# Altium PCB fhd-hdr.PcbDoc
Units mil, origin at the board's own origin, x right, y up, seen from the top; angles counter-clockwise.
Board outline 1400 x 650 mil, 6 copper layers (Top, 2-GND, 3-SIG, 4-SIG, 5-GND, Bottom), stack 46.142 mil thick; 75 components, 43 nets, 307 pads, 181 vias.
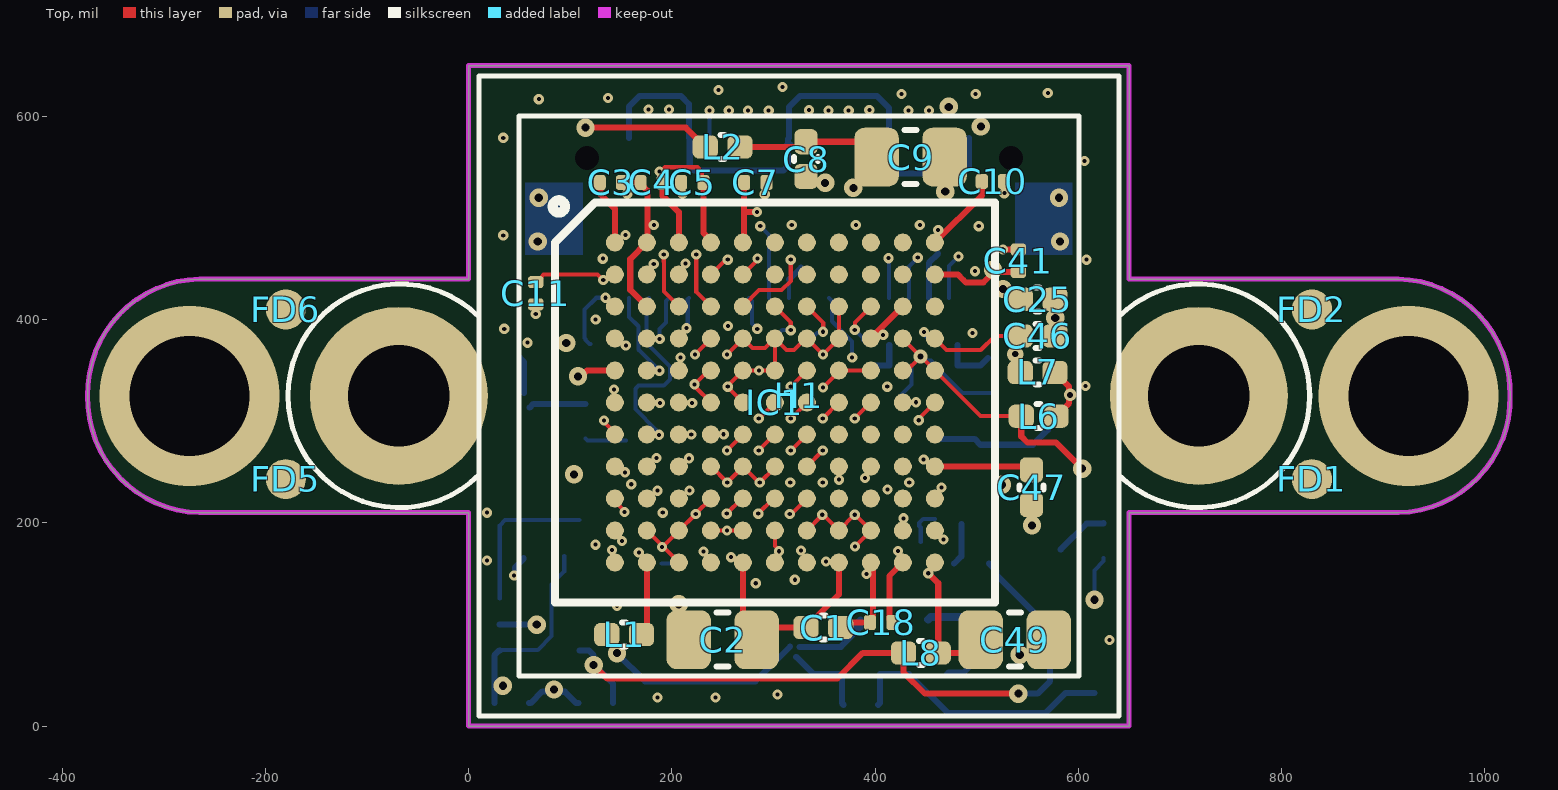
[diagram p0: Top view]
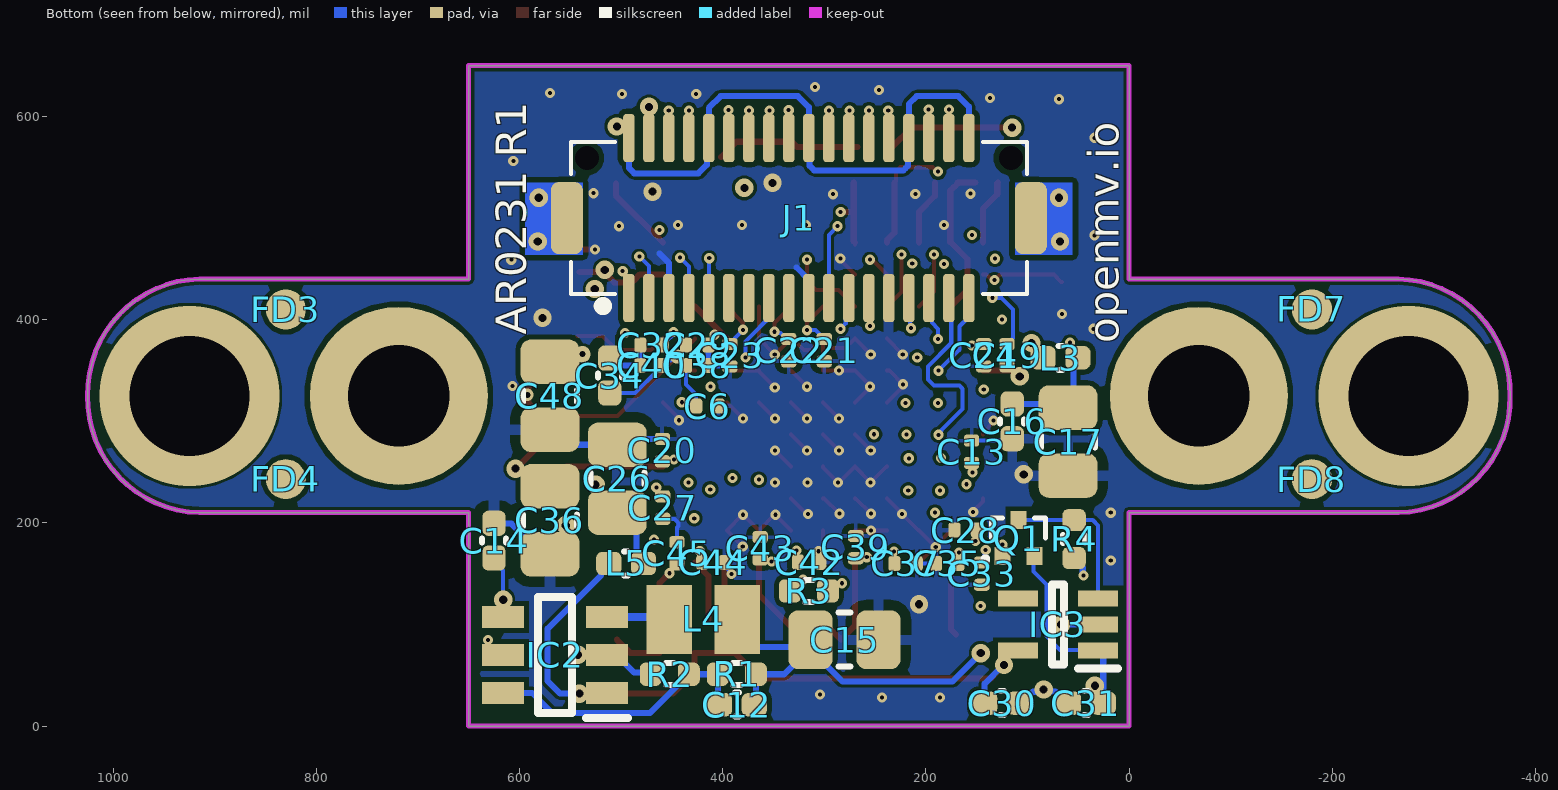
[diagram p1: Bottom view, seen from below]
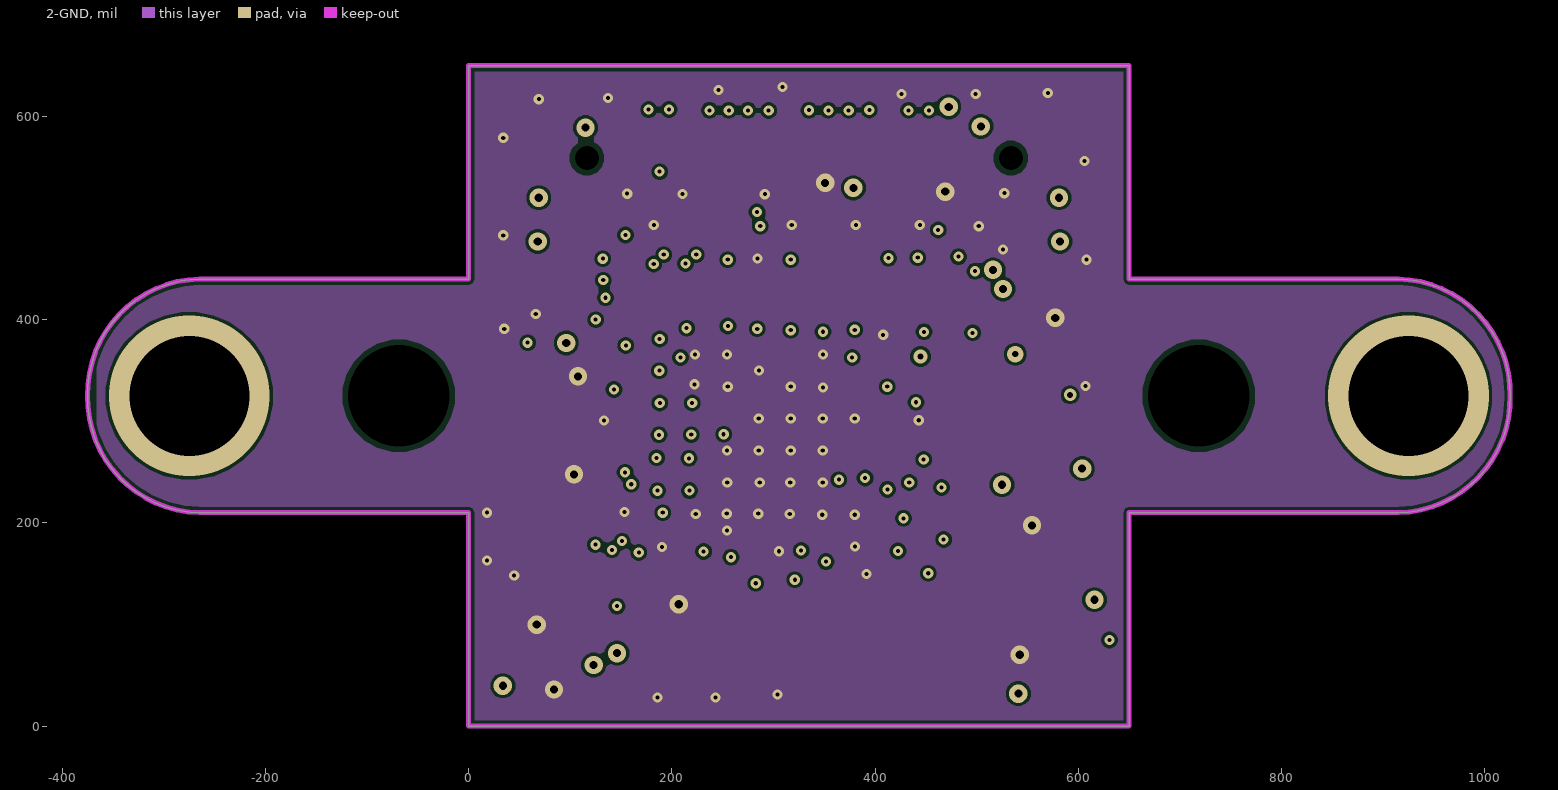
[diagram p2: 2-GND]
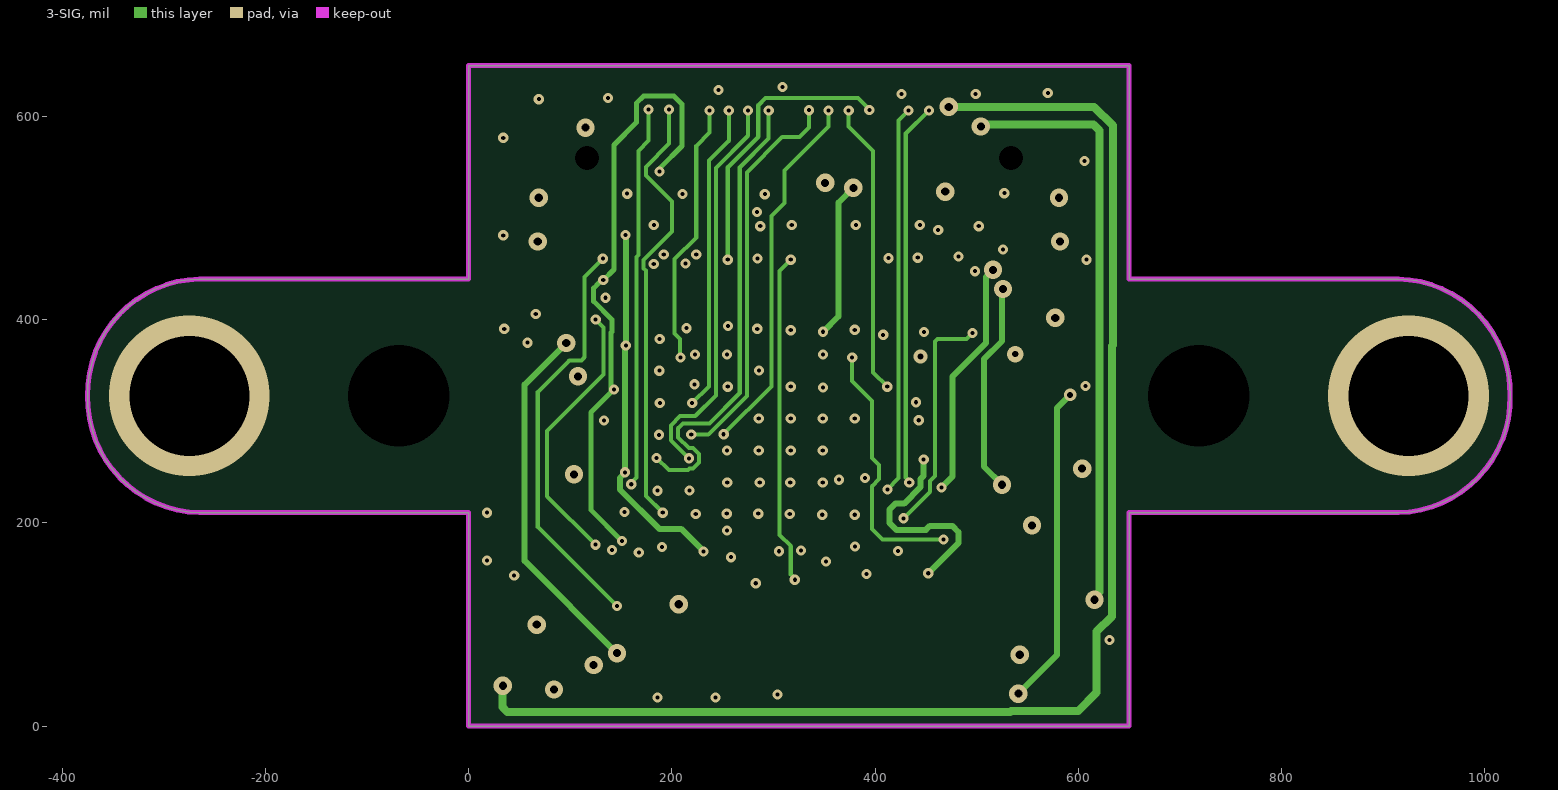
[diagram p3: 3-SIG]
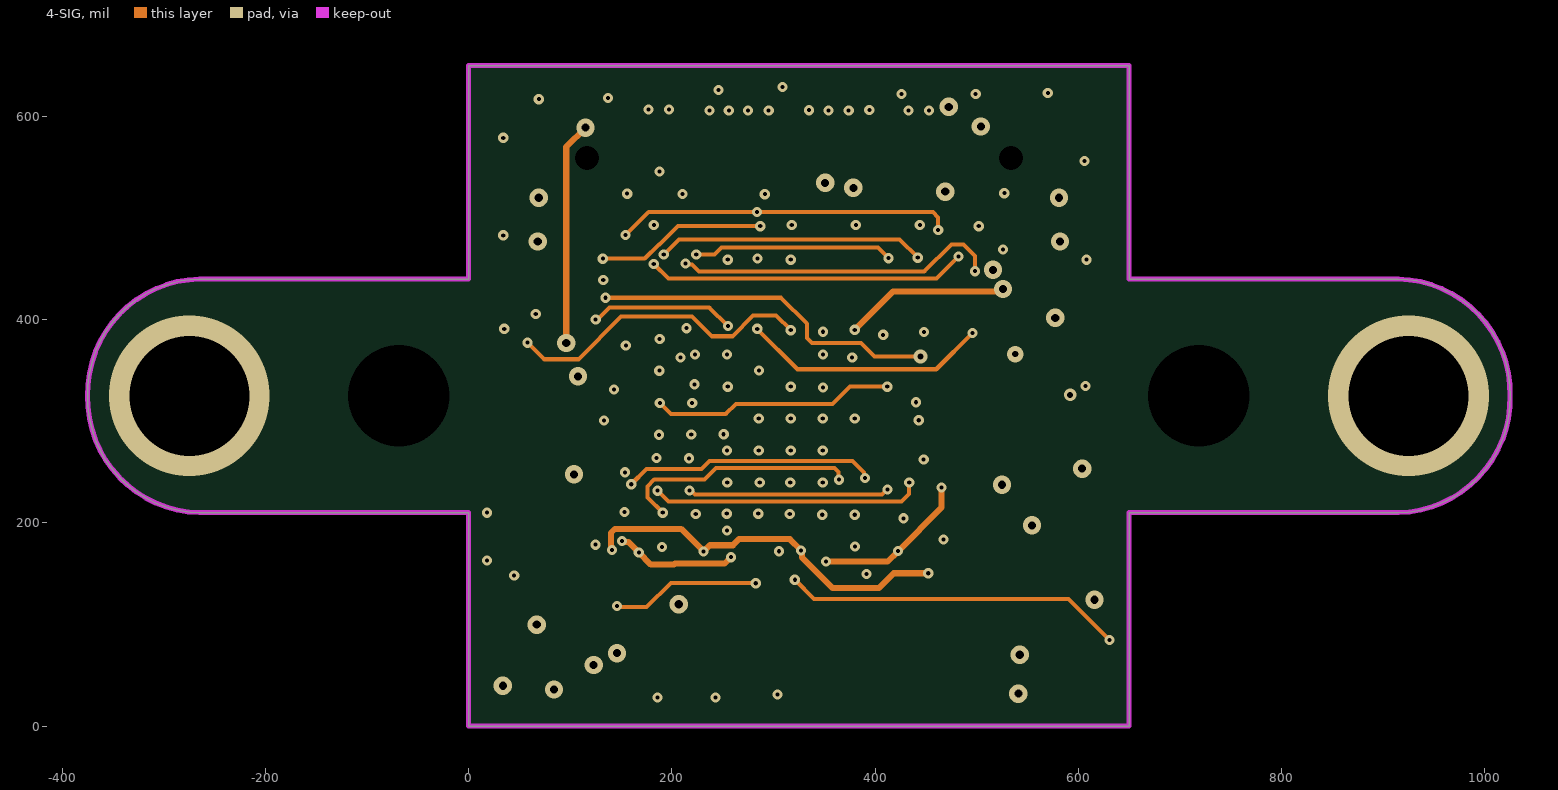
[diagram p4: 4-SIG]
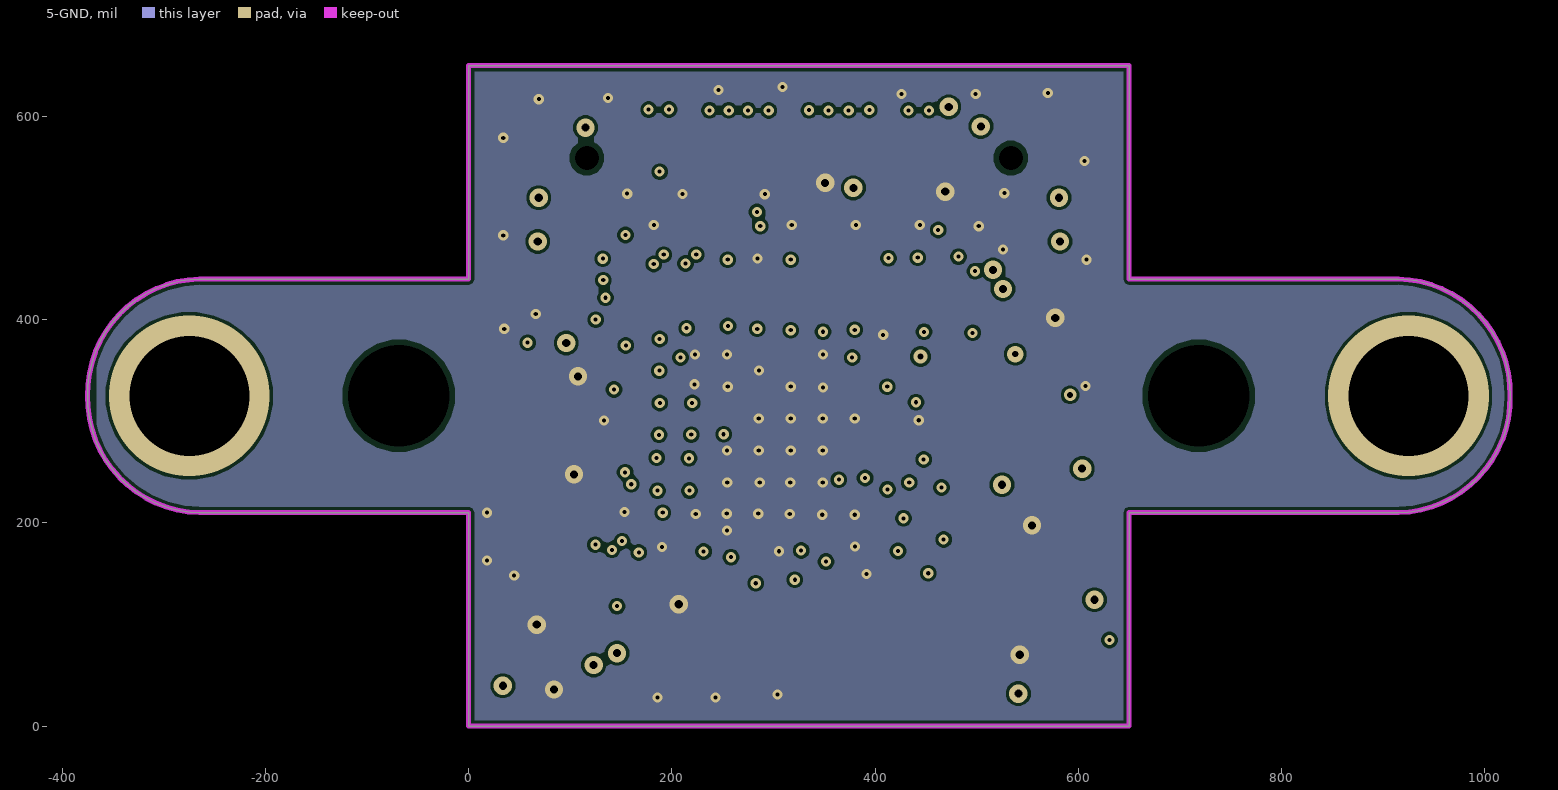
[diagram p5: 5-GND]
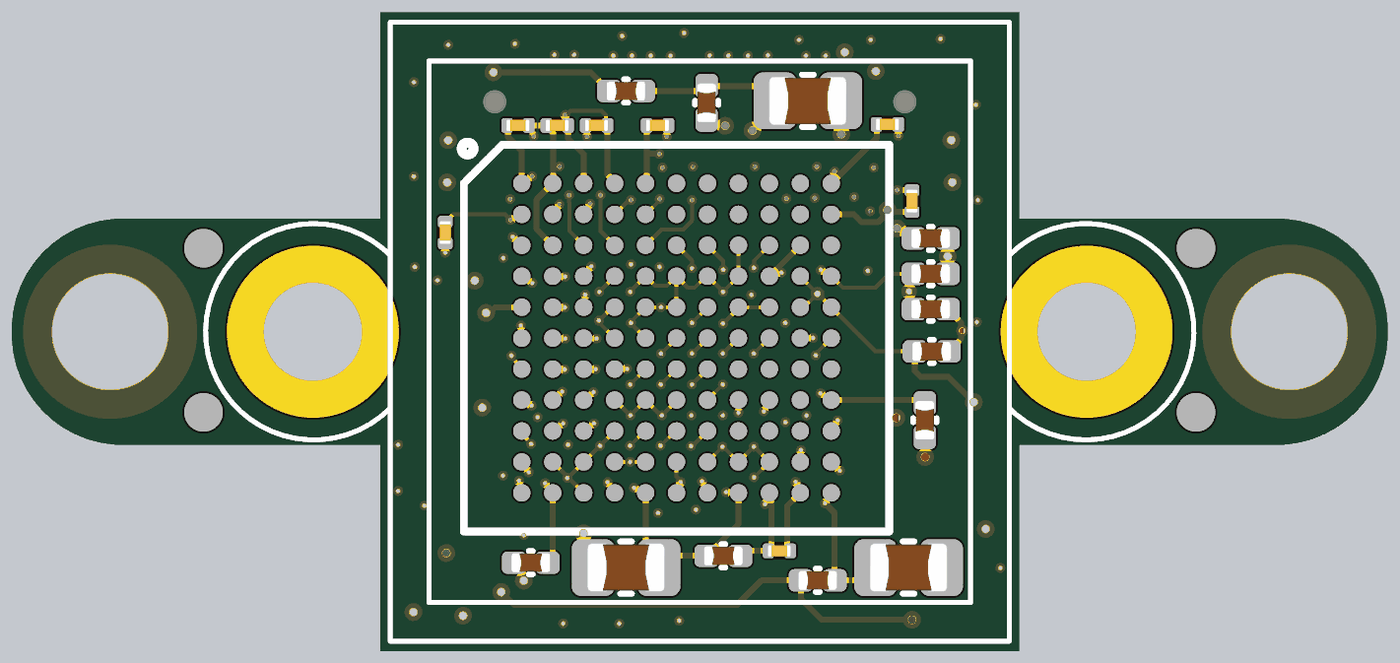
[diagram p6: 3D render of the assembled board from above, using the file's embedded part models]
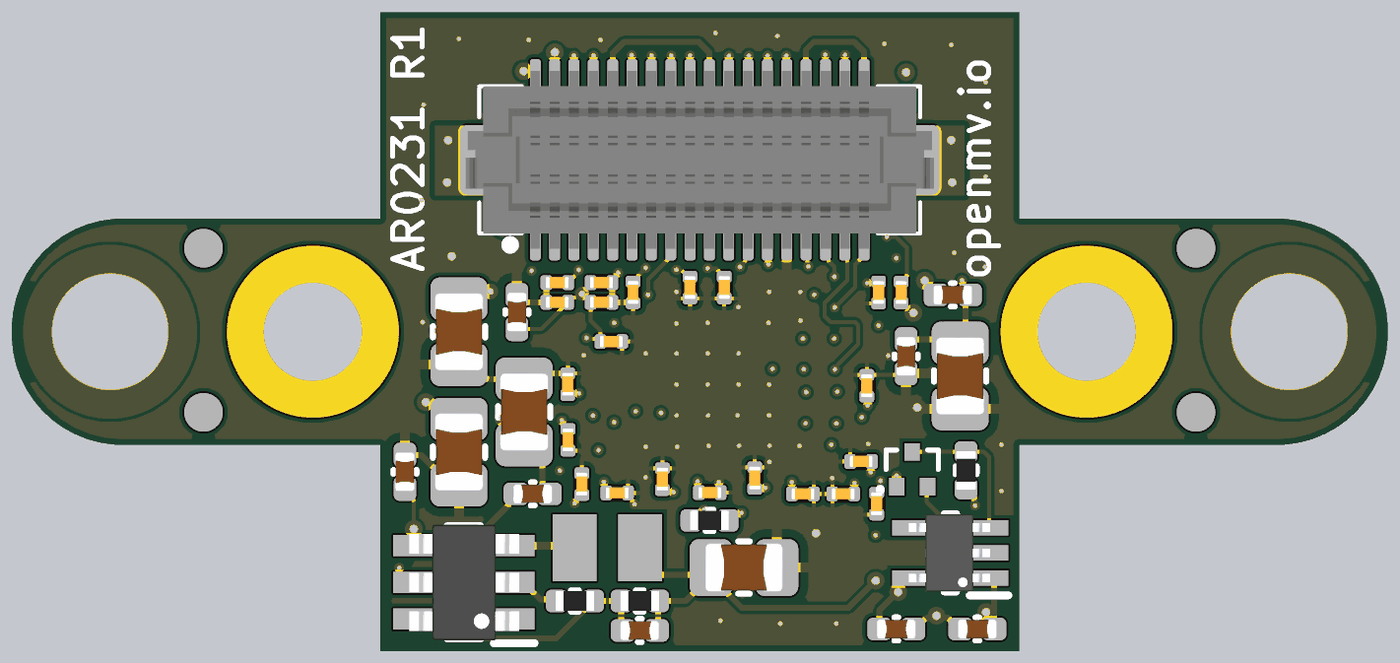
[diagram p7: 3D render of the assembled board from below, using the file's embedded part models]

## Layer stack, top to bottom
Top Solder: solder mask 0.4, Solder Resist, Dk 3.5
Top: signal copper 1.378
Dielectric 2: prepreg 5, PP-006, Dk 4.1
2-GND: signal copper 1.378
Dielectric 3: prepreg 10, PP-006, Dk 4.1
3-SIG: signal copper 1.378
Dielectric 1: dielectric 7.874, FR-4, Dk 4.8
4-SIG: signal copper 1.378
Dielectric 4: prepreg 10, PP-006, Dk 4.1
5-GND: signal copper 1.378
Dielectric 9: prepreg 5, PP-006, Dk 4.1
Bottom: signal copper 1.378
Bottom Solder: solder mask 0.4, Solder Resist, Dk 3.5

## Board outline
914.97,210 649.97,210 649.97,0 -0.03,0 -0.03,210 -265.03,210 cw(c-262.53,322.5) -375.03,325 cw(c-262.53,327.5) -265.03,440 -0.03,440 -0.03,650 649.97,650 649.97,440 914.97,440 cw(c912.47,327.5) 1024.97,325 cw(c912.47,322.5)

## Design rules (kind name [scope] priority, off if disabled: settings)
BoardOutlineClearance mdCopperDimension [All] p1: gap=10 ignorepadtopadclearanceinfootprint=FALSE except(0: Arc-SplitContinuation Track-SplitContinuation SMDPad-SplitContinuation THPad-SplitContinuation Via-SplitContinuation Fill-SplitContinuation Poly-SplitContinuation Region-SplitContinuation Text-SplitContinuation; 3: Poly-OutlineEdge Poly-CavityEdge Poly-CutoutEdge Poly-SplitBarrior)
Clearance [All] p1: gap=3 ignorepadtopadclearanceinfootprint=FALSE except(5: SMDPad-Fill SMDPad-Poly SMDPad-Region THPad-Fill THPad-Poly THPad-Region Fill-Fill Fill-Poly Fill-Region Poly-Poly Poly-Region Region-Region)
ComponentClearance ComponentClearance_1 [InComponent('H1')] p1: gap=0 collisioncheckmode=3 verticalgap=0 showdistances=FALSE
ComponentClearance [not InComponent('H1')] p2: gap=6 collisioncheckmode=3 verticalgap=0 showdistances=FALSE
HoleSize HoleSize_For_NetClass_signal [InNetClass('signal')] p1: absolutevalues=TRUE maxlimit=4 minlimit=4 maxpercent=80.000 minpercent=20.000
HoleSize HoleSize_For_NetClass_pwr [InNetClass('pwr')] p2: absolutevalues=TRUE maxlimit=4 minlimit=4 maxpercent=80.000 minpercent=20.000
HoleSize HoleSize_For_NetClass_gnd [InNetClass('gnd')] p3: absolutevalues=TRUE maxlimit=4 minlimit=4 maxpercent=80.000 minpercent=20.000
HoleSize [All] p4: absolutevalues=TRUE maxlimit=100000 minlimit=4 maxpercent=80.000 minpercent=20.000
HoleToHoleClearance mdDrill [All] p1: gap=3 allowstackedmicrovias=TRUE
MinimumSolderMaskSliver [All] p1 off: minsoldermaskwidth=10
PasteMaskExpansion Expansion_SMDPaste_OFF [InPadClass('SMDPaste_OFF')] p1: expansion=0
PasteMaskExpansion mlMinCreamFrame [All] p2: expansion=0
PolygonConnect 0201 [HasFootprint('C0201')] p1: thpad.connectstyle=Relief thpad.reliefconductorwidth=10 thpad.reliefentries=4 thpad.polygonreliefangle="90 Angle" thpad.airgapwidth=10 smdpad.connectstyle=Relief smdpad.reliefconductorwidth=4 smdpad.reliefentries=4 smdpad.polygonreliefangle="90 Angle" smdpad.airgapwidth=6 via.connectstyle=Direct via.reliefconductorwidth=10 via.reliefentries=4 via.polygonreliefangle="90 Angle" via.airgapwidth=10
PolygonConnect PolygonConnect_1 [All] p2: thpad.connectstyle=Relief thpad.reliefconductorwidth=10 thpad.reliefentries=4 thpad.polygonreliefangle="90 Angle" thpad.airgapwidth=10 smdpad.connectstyle=Relief smdpad.reliefconductorwidth=10 smdpad.reliefentries=4 smdpad.polygonreliefangle="90 Angle" smdpad.airgapwidth=10 via.connectstyle=Direct via.reliefconductorwidth=10 via.reliefentries=4 via.polygonreliefangle="90 Angle" via.airgapwidth=10
RoutingVias [All] p1: holewidth=4 width=10 viastyle="Through Hole" minholewidth=4 minwidth=10 maxholewidth=100 maxwidth=100
SolderMaskExpansion mlMinStopFrame [All] p1: expansion=2 istentingtop=FALSE
Width Width_For_NetClass_signal [InNetClass('signal')] p1: maxlimit=10 minlimit=3 preferedwidth=3
Width Width_For_NetClass_pwr [InNetClass('pwr')] p2: maxlimit=10 minlimit=3 preferedwidth=3
Width Width_For_NetClass_gnd [InNetClass('gnd')] p3: maxlimit=10 minlimit=3 preferedwidth=3
Width [All] p4: maxlimit=10 minlimit=3 preferedwidth=3
25 further rules are at their usual default settings.

## Classes and differential pairs
pad class SMDPaste_OFF: FD1-1 FD2-1 FD3-1 FD4-1 FD5-1 FD6-1 FD7-1 FD8-1 J1-1 J1-2 J1-3 J1-4 J1-5 J1-6 J1-7 J1-8 J1-9 J1-10 J1-11 J1-12 J1-13 J1-14 J1-15 J1-16 J1-17 J1-18 J1-19 J1-20 J1-21 J1-22 J1-23 J1-24 J1-25 J1-26 J1-27 J1-28 J1-29 J1-30 J1-31 J1-32 J1-33 J1-34 J1-35 J1-36

## Components (designator, comment, footprint, x,y, rotation, side; value= is the part's Value field where it differs from the comment)
C1 "4.7uF" 0402 349,97 r180 top
C2 "22uF" 0805 249.97,85 r0 top
C3 "0.22uF" C0201 140,535 r0 top
C4 "0.22uF" C0201 179.97,535 r180 top
C5 "0.22uF" C0201 219.97,535 r180 top
C6 "0.22uF" C0201 414.97,315 r0 bottom
C7 "0.22uF" C0201 282,535 r0 top
C8 "4.7uF" 0402 332,558 r90 top
C9 "22uF" 0805 434.97,560 r180 top
C10 "0.22uF" C0201 516,536 r0 top
C11 "0.22uF" C0201 66,426 r270 top
C12 "6.8pF" 0402 386,21 r0 bottom
C13 "0.22uF" C0201 154.97,270 r270 bottom
C14 "4.7uF" 0402 624.97,182.5 r270 bottom
C15 "22uF" 0805 280,85 r0 bottom
C16 "4.7uF" 0402 114.97,300 r90 bottom
C17 "22uF" 0805 59.97,280 r90 bottom
C18 "0.22uF" C0201 406,102 r180 top
C19 "0.22uF" C0201 120,365 r270 bottom
C20 "0.22uF" C0201 459.3,271.61 r270 bottom
C21 "0.22uF" C0201 299.97,370 r270 bottom
C22 "0.22uF" C0201 334.97,370 r270 bottom
C23 "0.22uF" C0201 392.86,365.02 r270 bottom
C24 "0.22uF" C0201 143,365 r270 bottom
C25 "4.7uF" 0402 560,420 r180 top
C26 "22uF" 0805 503.64,243.41 r270 bottom
C27 "0.22uF" C0201 459,215 r90 bottom
C28 "0.22uF" C0201 160.79,192.96 r180 bottom
C29 "0.22uF" C0201 424.97,375 r180 bottom
C30 "4.7uF" 0402 124.97,22.5 r0 bottom
C31 "4.7uF" 0402 42.47,22.5 r180 bottom
C32 "0.22uF" C0201 469.97,375 r0 bottom
C33 "0.22uF" C0201 144.97,150 r90 bottom
C34 "4.7uF" 0402 511,345 r270 bottom
C35 "0.22uF" C0201 179,160 r180 bottom
C36 "22uF" 0805 569.97,202.5 r90 bottom
C37 "0.22uF" C0201 219.97,160 r0 bottom
C38 "0.22uF" C0201 424.97,355 r180 bottom
C39 "0.22uF" C0201 268.98,176.09 r270 bottom
C40 "0.22uF" C0201 469.97,355 r0 bottom
C41 "0.22uF" C0201 541,458 r90 top
C42 "0.22uF" C0201 314.79,161.33 r0 bottom
C43 "0.22uF" C0201 363,175 r270 bottom
C44 "0.22uF" C0201 409,161 r0 bottom
C45 "0.22uF" C0201 444.97,170 r270 bottom
C46 "4.7uF" 0402 560,384 r180 top
C47 "4.7uF" 0402 554,235 r90 top
C48 "22uF" 0805 569.97,325 r90 bottom
C49 "22uF" 0805 537.47,85 r180 top
FD1 "FIDUCIAL1X2" FIDUCIAL-1X2 829.97,243 r0 top
FD2 "FIDUCIAL1X2" FIDUCIAL-1X2 829.97,410 r0 top
FD3 "FIDUCIAL1X2" FIDUCIAL-1X2 829.97,410 r180 bottom
FD4 "FIDUCIAL1X2" FIDUCIAL-1X2 829.97,243 r180 bottom
FD5 "FIDUCIAL1X2" FIDUCIAL-1X2 -180.03,243 r0 top
FD6 "FIDUCIAL1X2" FIDUCIAL-1X2 -180.03,410 r0 top
FD7 "FIDUCIAL1X2" FIDUCIAL-1X2 -180.03,410 r180 bottom
FD8 "FIDUCIAL1X2" FIDUCIAL-1X2 -180.03,243 r180 bottom
H1 "LENSMOUNT20MM" LENSMOUNT-20MM 324.97,325 r0 top locked
IC1 "AR0231AT7C00XUEA0-DRBR-E" BGA121C80P11X11_1100X1000X155 301.35,318.5 r0 top locked
IC2 "TLV62568PDDCR" SOT95P280X110-6N 564.97,70 r0 bottom
IC3 "MIC5365-2.8YC5-TR" SOT65P210X110-5N 69.97,100 r0 bottom
J1 "DF12-36-DP" DF12-36-DP 325,500 r0 bottom
L1 "100" 0402 153,90 r180 top
L2 "100" 0402 249.97,570 r180 top
L3 "100" 0402 67.47,362.5 r0 bottom
L4 "MAKK2016T2R2M" INDC2016X100N 419,105 r0 bottom
L5 "100" 0402 494.97,160 r0 bottom
L6 "100" 0402 561,305 r0 top
L7 "100" 0402 560,348 r0 top
L8 "100" 0402 445,72 r180 top
Q1 "SSM3J15FV,L3F" SSM3J15FV 108.8,184.98 r180 bottom
R1 "100K" R0402 386,51 r180 bottom
R2 "100K" R0402 452,51 r0 bottom
R3 "10K" R0402 315,133 r180 bottom
R4 "100K" R0402 54,184 r270 bottom

## Footprints (in the part's own frame and the unit in brackets; to place one, negate y for a bottom-side part, rotate by r counter-clockwise, add the part's x,y. Pads: shape width x height; smd on the part's side, far side on the other; paste and mask are expansions set on the pad)
0402 [mm] "Chip Capacitor, 2-Leads, Body  0402 (in) 1005 (mm), IPC Medium Density"
  rrect52% 0.63x0.58 smd mask+0.05: 1(-0.435,0) 2(0.435,0)
  silkscreen extent -0.05,-0.3 0.05,0.3, body extent -0.5,-0.25 0.5,0.25, height 0.5
0805 [mm] "Chip Capacitor, Body 0805 imperial, 2.0x1.2mm, IPC Medium Density"
  rrect45% 1.11x1.47 smd: 1(-0.85,0) 2(0.85,0)
  silkscreen extent -0.15,-0.67 0.15,0.67, body extent -1,-0.62 1,0.63, height 1.25
BGA121C80P11X11_1100X1000X155 [mil] "BGA121C80P11X11_1100X1000X155"
  rrect100% 17.72x17.72 smd: A1(-157.48,157.48) A2(-125.98,157.48) A3(-94.49,157.48) A4(-62.99,157.48) A5(-31.5,157.48) A6(0,157.48) A7(31.5,157.48) A8(62.99,157.48) A9(94.49,157.48) A10(125.98,157.48) A11(157.48,157.48) B1(-157.48,125.98) B2(-125.98,125.98) B3(-94.49,125.98) B4(-62.99,125.98) B5(-31.5,125.98) B6(0,125.98) B7(31.5,125.98) B8(62.99,125.98) B9(94.49,125.98) B10(125.98,125.98) B11(157.48,125.98) C1(-157.48,94.49) C2(-125.98,94.49) C3(-94.49,94.49) C4(-62.99,94.49) C5(-31.5,94.49) C6(0,94.49) C7(31.5,94.49) C8(62.99,94.49) C9(94.49,94.49) C10(125.98,94.49) C11(157.48,94.49) D1(-157.48,62.99) D2(-125.98,62.99) D3(-94.49,62.99) D4(-62.99,62.99) D5(-31.5,62.99) D6(0,62.99) D7(31.5,62.99) D8(62.99,62.99) D9(94.49,62.99) D10(125.98,62.99) D11(157.48,62.99) E1(-157.48,31.5) E2(-125.98,31.5) E3(-94.49,31.5) E4(-62.99,31.5) E5(-31.5,31.5) E6(0,31.5) E7(31.5,31.5) E8(62.99,31.5) E9(94.49,31.5) E10(125.98,31.5) E11(157.48,31.5) F1(-157.48,0) F2(-125.98,0) F3(-94.49,0) F4(-62.99,0) F5(-31.5,0) F6(0,0) F7(31.5,0) F8(62.99,0) F9(94.49,0) F10(125.98,0) F11(157.48,0) G1(-157.48,-31.5) G2(-125.98,-31.5) G3(-94.49,-31.5) G4(-62.99,-31.5) G5(-31.5,-31.5) G6(0,-31.5) G7(31.5,-31.5) G8(62.99,-31.5) G9(94.49,-31.5) G10(125.98,-31.5) G11(157.48,-31.5) H1(-157.48,-62.99) H2(-125.98,-62.99) H3(-94.49,-62.99) H4(-62.99,-62.99) H5(-31.5,-62.99) H6(0,-62.99) H7(31.5,-62.99) H8(62.99,-62.99) H9(94.49,-62.99) H10(125.98,-62.99) H11(157.48,-62.99) J1(-157.48,-94.49) J2(-125.98,-94.49) J3(-94.49,-94.49) J4(-62.99,-94.49) J5(-31.5,-94.49) J6(0,-94.49) J7(31.5,-94.49) J8(62.99,-94.49) J9(94.49,-94.49) J10(125.98,-94.49) J11(157.48,-94.49) K1(-157.48,-125.98) K2(-125.98,-125.98) K3(-94.49,-125.98) K4(-62.99,-125.98) K5(-31.5,-125.98) K6(0,-125.98) K7(31.5,-125.98) K8(62.99,-125.98) K9(94.49,-125.98) K10(125.98,-125.98) K11(157.48,-125.98) L1(-157.48,-157.48) L2(-125.98,-157.48) L3(-94.49,-157.48) L4(-62.99,-157.48) L5(-31.5,-157.48) L6(0,-157.48) L7(31.5,-157.48) L8(62.99,-157.48) L9(94.49,-157.48) L10(125.98,-157.48) L11(157.48,-157.48)
  silkscreen extent -219,-197 217,199, body extent -217,-197 217,197, height 39
C0201 [mil] "0201 IPC-7351"
  rrect50% 12x15 smd mask+1.97: 1(-11,0) 2(11,0)
  body extent -12,-6 12,6, height 14
DF12-36-DP [mm] "36 Position Connector Receptacle, Center Strip Contacts Surface Mount Gold"
  rrect50% 0.8x1.8 smd mask+0.05: 0(-5.8,0) 0(5.8,0)
  rrect50% 0.28x1.2 smd mask+0.05: 1(4.25,2) 2(4.25,-2) 3(3.75,2) 4(3.75,-2) 5(3.25,2) 6(3.25,-2) 7(2.75,2) 8(2.75,-2) 9(2.25,2) 10(2.25,-2) 11(1.75,2) 12(1.75,-2) 13(1.25,2) 14(1.25,-2) 15(0.75,2) 16(0.75,-2) 17(0.25,2) 18(0.25,-2) 19(-0.25,2) 20(-0.25,-2) 21(-0.75,2) 22(-0.75,-2) 23(-1.25,2) 24(-1.25,-2) 25(-1.75,2) 26(-1.75,-2) 27(-2.25,2) 28(-2.25,-2) 29(-2.75,2) 30(-2.75,-2) 31(-3.25,2) 32(-3.25,-2) 33(-3.75,2) 34(-3.75,-2) 35(-4.25,2) 36(-4.25,-2)
  round 0 hole 0.6 unplated: MH1(-5.3,-1.5) MH2(5.3,-1.5)
  silkscreen extent -5.7,-1.9 5.7,2.3, body extent -6.05,-2.3 6.05,2.3, height 2.3
FIDUCIAL-1X2 [mm] "FIDUCIAL-1X2"
  rrect100% 1x1 smd paste+0: 1(0,0)
INDC2016X100N [mm] "INDC2016X100N"
  rect 1.14x1.73 smd: 1(-0.847,0) 2(0.847,0)
  body extent -1,-0.8 1,0.8, height 1
LENSMOUNT-20MM [mil] "LENSMOUNT-20MM"
  round 175 / inner round 0 / far side round 175 hole 100: P$1(-393.7,0) P$2(393.7,0)
  silkscreen extent -503,-315 503,315
R0402 [mm] "Chip Resistor, 2-Leads, Body  0402 (in) 1005 (mm), IPC Medium Density"
  rrect51% 0.55x0.58 smd mask+0.05: 1(-0.475,0) 2(0.475,0)
  silkscreen extent -0.1,-0.28 0.1,0.28, body extent -0.5,-0.25 0.5,0.25, height 0.34
SOT65P210X110-5N [mm] "SOT65P210X110-5N"
  rect 1x0.4 smd: 1(-1,0.65) 2(-1,0) 3(-1,-0.65) 4(1,-0.65) 5(1,0.65)
  silkscreen extent -1.5,-1 0.15,1.1, body extent -1.02,-1 1.07,1, height 0.96
SOT95P280X110-6N [mil] "SOT95P280X100-6N"
  rect 41.34x21.65 smd: 1(-51.18,37.4) 2(-51.18,0) 3(-51.18,-37.4) 4(51.18,-37.4) 5(51.18,0) 6(51.18,37.4)
  silkscreen extent -72,-57 17,62, body extent -56,-59 56,59, height 44
SSM3J15FV [mm]
  rect 0.4x0.45 smd: 1(-0.4,-0.45) 2(0.4,-0.45) 3(0,0.45)
  silkscreen extent -0.88,-0.58 0.67,0.5, body extent -0.6,-0.6 0.6,0.6, height 0.6

## Part data
C1 C8 C14 C16 C25 C30 C31 C34 C46 C47: library part CAP_0402, "0402 (1005 Metric) Nick Garner - TeleSense", MPN=JMK105BBJ475MV-F, DeviceSetName=CAP_0402, GateName_1=G$1, LibraryName=0402, SymbolName_1=CAP
C2 C9 C15 C17 C26 C36 C48 C49: library part 22UF-0805-6.3V-20%, "22ÂµF ceramic capacitors    A capacitor is a passive two-terminal electrical component used to store electrical energy temporarily in an electric field.", MPN=CL21A226MQQNNNE, DeviceName=-0805-6.3V-20%, DeviceSetName=22UF, GateName_1=G$1, LibraryName=SparkFun-Capacitors, PROD_ID=CAP-08402, SymbolName_1=CAP
C3 C4 C5 C6 C7 C10 C11 C13 C18 C19 C20 C21 C22 C23 C24 C27 C28 C29 C32 C33 C35 C37 C38 C39 C40 C41 C42 C43 C44 C45: library part C-EUC0201, "CAPACITOR, European symbol", MPN=GRM033R60J224ME15D, DeviceName=C0201, DeviceSetName=C-EU, GateName_1=G$1, LibraryName=rcl, POPULARITY=0, SPICEPREFIX=C, SymbolName_1=C-EU
C12: library part CAP_0402, "0402 (1005 Metric) Nick Garner - TeleSense", MPN=GRM1555C1H6R8DA01D, DeviceSetName=CAP_0402, GateName_1=G$1, LibraryName=0402, SymbolName_1=CAP
FD1 FD2 FD3 FD4 FD5 FD6 FD7 FD8: "Fiducial Alignment Points    Point-of-reference for pick-and-place machines and other optical instruments.", DeviceName=1X2, DeviceSetName=FIDUCIAL, GateName_1=G$1, LibraryName=SparkFun-Aesthetics, SymbolName_1=FIDUCIAL
IC1: "Image Sensor Color CMOS 1928 x 1208Pixels   Source:  Datasheet", MANUFACTURER_NAME=onsemi, MPN=AR0231AT7C00XUEA0-DPBR, ARROW_PART_NUMBER=ARROW_PART_NUMBER, ARROW_PRICE-STOCK=ARROW_PRICE-STOCK, DeviceSetName=AR0231AT7C00XUEA0-DRBR-E, GateName_1=G$1, HEIGHT=1.55mm, LibraryName=AR0231AT7C00XUEA0-DRBR-E, MANUFACTURER_PART_NUMBER=AR0231AT7C00XUEA0-DRBR-E, MOUSER_PART_NUMBER=MOUSER_PART_NUMBER, MOUSER_PRICE-STOCK=MOUSER_PRICE-STOCK, SymbolName_1=AR0231AT7C00XUEA0-DRBR-E
IC2: "2.5V-5.5V input, 1A high efficiency step-down buck converter in SOT23 and SOT563 package   Source:  Datasheet", MANUFACTURER_NAME="Texas Instruments", DeviceSetName=TLV62568PDDCR, GateName_1=G$1, HEIGHT=1.1mm, LibraryName=TLV62568PDDCR, MANUFACTURER_PART_NUMBER=TLV62568PDDCR, MOUSER_PART_NUMBER=595-TLV62568PDDCR, MOUSER_PRICE-STOCK=https://www.mouser.co.uk/ProductDetail/Texas-Instruments/TLV62568PDDCR?qs=1mbolxNpo8f1FPchIXcxyQ%3D%3D, MPN=TLV62568PDDCR, SymbolName_1=TLV62568PDDCR
IC3: "IC REG LINEAR 2.8V 150MA SC70-5   Source:  Datasheet", MANUFACTURER_NAME=Microchip, DeviceSetName=MIC5365-2.8YC5-TR, GateName_1=G$1, HEIGHT=1.1mm, LibraryName=MIC5365-2.8YC5-TR, MANUFACTURER_PART_NUMBER=MIC5365-2.8YC5-TR, MOUSER_PART_NUMBER=998-MIC5365-2.8YC5TR, MOUSER_PRICE-STOCK=https://www.mouser.co.uk/ProductDetail/Microchip-Technology-Atmel/MIC5365-2.8YC5-TR?qs=U6T8BxXiZAX3mJDSWJyjVA%3D%3D, MPN=MIC5365-2.8YC5-TR, SymbolName_1=MIC5365-2.8YC5-TR
J1: MPN=DF12NB(3.0)-36DP-0.5V(51), DeviceSetName=DF12-36-DP, GateName_1=G$1, LibraryName=DF12NB(3.0)-36DP-0.5V(51), SymbolName_1=DF12-36
L1 L2 L3 L5 L6 L7 L8: library part INDUCTOR_0402, MPN=MFBM1V1005-101-R, DeviceSetName=INDUCTOR_0402, GateName_1=G$1, LibraryName=0402, SymbolName_1=INDUCTOR
L4: "INDUCTOR, METAL CORE Check availability", PACKAGE="2016 Taiyo Yuden", AVAILABILITY="In Stock", DeviceSetName=MAKK2016T2R2M, GateName_1=G$1, LibraryName=MAKK2016T2R2M, MF="Taiyo Yuden", MP=MAKK2016T2R2M, MPN=MAKK2016T2R2M, PRICE=None, PURCHASE-URL=https://pricing.snapeda.com/search/part/MAKK2016T2R2M/?ref=eda, SymbolName_1=MAKK2016T2R2M
Q1: library part PMXB120EPEZ, "MOSFET 30 V, P-channel Trench MOSFET   Source:  Datasheet", DeviceSetName=SSM3J15FV,L3F, GateName_1=G$1, HEIGHT=0.4mm, LibraryName=SSM3J15FV,L3F, MANUFACTURER_PART_NUMBER=SSM3J15FV,L3F, MPN=SSM3J15FV,L3F, SymbolName_1=SSM3J15FV,L3F
R1 R2 R4: library part R-US_R0402, "RESISTOR, American symbol", MPN=AC0402FR-07100KL, DeviceName=R0402, DeviceSetName=R-US_, GateName_1=G$1, LibraryName=rcl, POPULARITY=34, SPICEPREFIX=R, SymbolName_1=R-US
R3: library part R-US_R0402, "RESISTOR, American symbol", MPN=AC0402FR-1310KL, DeviceName=R0402, DeviceSetName=R-US_, GateName_1=G$1, LibraryName=rcl, POPULARITY=34, SPICEPREFIX=R, SymbolName_1=R-US
H1: DeviceName=20MM, DeviceSetName=LENSMOUNT, GateName_1=G$1, LibraryName=lensmount, SymbolName_1=LENS

## Via types
v1: diameter 10, hole 4, Top to Bottom, tented both sides, 148 vias
v2: diameter 18, hole 8, Top to Bottom, tented both sides, 28 vias
v3: diameter 177.17/158.11/158.11/158.11/158.11/177.17 (per signal layer), hole 118.11, Top to Bottom, 2 vias
v4: diameter 16, hole 6, Top to Bottom, tented both sides, 1 vias
v5: diameter 14, hole 6, Top to Bottom, tented both sides, 1 vias
v6: diameter 12, hole 6, Top to Bottom, tented both sides, 1 vias

## Nets (pads, with @x,y where several pads share a name; then routed paths per layer and width w, separated by ;. In a path a pad name is that pad's centre, name@x,y a point inside that pad or via, vN(x,y) a via of type N, cw(c..) or ccw(c..) an arc to the next point about the centre after c; other vN are vias at no path point)
DCMI_CLK: IC1.B4 J1.12 | length 304.3
  Top w4: IC1.B4 251.73,457.85 253.85,457.85 v1(255,459)
  3-SIG w4: v1(255,459) 255,550.01 285,580.01 285,611 292,618 383,618 394.31,606.69 v1(394.31,606.41)
DCMI_D0: IC1.B2 J1.3 | length 359.4
  4-SIG w4: v1(182.14,454.7) 196.48,440.36 460.36,440.36 v1(482,462)
  Bottom w4: J1.3 472.64,452.64 v1(482,462)
DCMI_D1: IC1.B3 J1.1 | length 318.9
  4-SIG w4: v1(213.38,455.24) 214.53,454.09 219.76,454.09 226.49,447.36 448.36,447.36 475,474 487,474 498.37,462.63 v1(498.37,447.72)
DCMI_D2: IC1.C4 J1.9 | length 292.8
  Top w4: v1(224,464) 224,427.35 IC1.C4
  4-SIG w4: v1(224,464) 242,464 249,471 402.66,471 v1(413.18,460.48)
  Bottom w4: v1(413.18,460.48) 413.58,460.08 J1.9
DCMI_D3: IC1.C3 J1.7 | length 364.2
  Top w4: v1(192,464) 192,457.14 192.14,457 192.14,427.71 IC1.C3
  4-SIG w4: v1(192,464) 207,479 424,479 v1(442,461)
  Bottom w4: J1.7 433.27,452.27 v1(442,461)
DCMI_D4: IC1.D2 J1.31 | length 44
  Bottom w4: v1(188,381) 188,391 194,397 194,418.21 J1.31
DCMI_D5: IC1.D3 J1.29 | length 30.6
  Bottom w4: v1(214.52,391.58) 215.63,392.69 215.63,420.15 J1.29
DCMI_D6: IC1.E2 J1.35 | length 83.9
  Bottom w4: J1.35 157.68,402.79 166.96,393.51 166.96,370.4 v1(187.6,349.76)
DCMI_D7: IC1.E3 J1.28 | length 287.4
  3-SIG w4: v1(208.45,362.7) 208,363.15 208,381 202.73,386.27 202.73,459.73 224,481 224,571 237,584 v1(237,606)
  Bottom w4: J1.28 237,579.32 v1(237,606)
DCMI_D8: IC1.F3 J1.26 | length 302.9
  3-SIG w4: v1(220,318) 236.37,334.37 236.37,556.47 256,576.1 v1(256,606)
DCMI_D9: IC1.G2 J1.33 | length 183.5
  Bottom w4: J1.33 174.97,418.87 174.97,377.03 198,354 198,341 192,335 167,335 164,332 164,312 184.58,291.42 184.58,291.11 187.4,288.3 v1(187.4,286.67)
DCMI_D10: IC1.H3 J1.24 | length 390.1
  3-SIG w4: v1(216.76,263.52) 199,281.28 199,296 208,305 223,305 243.37,325.37 243.37,549.37 275,581 v1(275,606)
DCMI_D11: IC1.H2 J1.22 | length 459.7
  3-SIG w4: v1(185,264) 197,252 216,252 217.52,253.52 220.9,253.52 226.76,259.38 226.76,267.66 220.9,273.52 216.66,273.52 206,284.18 206,293.1 210.9,298 237.1,298 266.79,327.69 266.79,549.8 295.29,578.3 v1(295.29,605.87)
DCMI_D12: IC1.J3 J1.8 | length 580.1
  3-SIG w4: v1(412.18,232.94) 423.18,243.95 423.18,596.18 v1(433,606)
  4-SIG w4: v1(217.32,231.73) 218.94,231.73 222.67,228 406.83,228 411.78,232.94 v1(412.18,232.94)
DCMI_D13: IC1.J2 J1.6 | length 643.6
  3-SIG w4: v1(433.62,239.65) 433.62,241.27 430.18,244.72 430.18,583.18 v1(453,606)
  4-SIG w4: v1(185.9,231.64) 196.54,221 426,221 433.59,228.59 433.59,239.61 v1(433.62,239.65)
DCMI_FSIN: IC1.K10 J1.23 | length 504.5
  3-SIG w4: v1(427.94,204.47) 454.06,230.59 454.06,241.06 459,246 459,378.66 461.34,381 490,381 v1(496,387)
  4-SIG w4: v1(284,391) 323.81,351.19 460.19,351.19 v1(496,387)
  Bottom w4: J1.23 278.83,418.21 278.83,396.39 284,391.22 v1(284,391)
DCMI_HSYNC: IC1.G3 J1.18 | length 387.1
  3-SIG w4: v1(219.06,286.81) 235.81,286.81 273.79,324.79 273.79,544.79 308.6,579.6 325.6,579.6 335,589 v1@335,606.12
  other v1: 334.98,606.15
DCMI_PCLK: IC1.F2 J1.14 | length 527.3
  3-SIG w4: v1(374,606) 374,590 398,566 398,348 v1(412,334)
  4-SIG w4: v1(188.13,317.96) 199.09,307 253,307 263,317 358.2,317 375.2,334 v1(412,334)
DCMI_PWDN: J1.25 Q1.1 | length 410.1
  3-SIG w4: v1(124.66,178.5) 77,226.17 77,290.31 132.61,345.92 132.61,392.39 v1(125,400)
  4-SIG w4: v1(125,400) 126.62,400 138.62,412 236.75,412 v1(255.1,393.65)
DCMI_PWDN_INT: IC3.3 Q1.3 R4.1 | length 152.3
  Bottom w4: IC3.3 30.6,197.6 35.7,202.7 R4.1 Q1.3
DCMI_RST: J1.21 R3.2 | length 797.4
  3-SIG w4: v1(132,460) 114,442 114,363 111,360 99,360 68,329 68,196 v1(146,118)
  4-SIG w4: v1(132,460) 173.3,460 187.3,474 188,474 206,492 v1(287,492) ; v1(146,118) 147,117 175,117 198.95,140.95 282.13,140.95 v1(282.53,140.54)
  Bottom w4: v1(287,492) 295.47,483.53 J1.21
DCMI_SCL: IC1.H8 J1.32 | length 673.3
  3-SIG w4: v1(191,210) 174.38,226.62 174.38,448.32 172.14,450.56 172.14,458.84 200,486.7 200,516.38 174.38,542 174.38,550.38 197.18,573.18 v1(197.18,606.9)
  4-SIG w4: v1(191,210) 175.9,225.1 175.9,235.79 182.61,242.5 232,242.5 243.5,254 360,254 364.14,249.86 364.14,242.71 v1(364.35,242.5)
DCMI_SDA: IC1.H9 J1.34 | length 625.2
  3-SIG w4: v1(160,238) 160,239.34 165.14,244.48 165.14,461.74 166.93,463.53 166.93,565.93 177.14,576.14 v1(177.14,606.72)
  4-SIG w4: v1(160,238) 175,253 229,253 237,261 377.68,261 389.05,249.63 389.05,245.19 v1(390.19,244.05)
DCMI_VSYNC: IC1.G4 J1.16 | length 361.4
  3-SIG w4: v1(250.97,287.24) 298,334.27 298,502 311,515 311,547 354,590 v1(354,606)
FB: C12.2 IC2.6 R1.1 R2.1 | length 266
  Bottom w6: C12.2 404.7,22.57 R1.1 R2.1 471.3,13 568,13 587.6,32.6 IC2.6
GND: C1.1 C2.1 C3.2 C4.2 C5.2 C6.1 C7.2 C8.1 C9.1 C10.2 C11.2 C13.1 C14.1 C15.1 C16.1 C17.1 C18.2 C19.2 C20.1 C21.2 C22.2 C23.2 C24.2 C25.1 C26.1 C27.1 C28.1 C29.2 C30.1 C31.1 C32.2 C33.1 C34.1 C35.1 C36.1 C37.1 C38.2 C39.1 C40.2 C41.2 C42.1 C43.1 C44.1 C45.1 C46.1 C47.1 C48.1 C49.1 IC1.A2 IC1.B5 IC1.C2 IC1.C8 IC1.C10 IC1.D4 IC1.D5 IC1.D6 IC1.D7 IC1.D8 IC1.D9 IC1.E1 IC1.E4 IC1.E5 IC1.E6 IC1.E7 IC1.E8 IC1.E9 IC1.F4 IC1.F5 IC1.F6 IC1.F7 IC1.F8 IC1.F9 IC1.F11 IC1.G1 IC1.G5 IC1.G6 IC1.G7 IC1.H4 IC1.H5 IC1.H6 IC1.H7 IC1.J1 IC1.J4 IC1.J5 IC1.J6 IC1.J7 IC1.K2 IC1.K3 IC1.K4 IC1.K5 IC1.K6 IC1.K7 IC1.K8 IC1.K9 IC1.L3 IC1.L6 IC1.L9 IC2.2 IC3.2 J1.5 J1.19 J1.27 R2.2 R4.2 | length 2083.4
  Top w4: v1(133.31,300.72) 133.31,299.14 143.87,288.58 IC1.G1 ; IC1.J1 143.87,221.14 153.37,211.64 v1(153.37,210.72) ; IC1.K2 190.22,177.67 v1(190.22,176.23) v1@190.57,176.23 ; IC1.L3 191.65,176.23 v1@190.57,176.23 ; v1(222.73,365.66) 238.36,381.29 IC1.D4 ; IC1.K4 IC1.K5 ; IC1.J4 223.48,209.13 v1(223.48,208.85) 207.15,192.52 IC1.K3 v1@190.57,176.23 ; IC1.H4 238.82,255.51 v1(254.48,239.85) 269.85,255.22 IC1.H5 285.51,239.85 v1(286.48,239.85) 301.35,254.72 IC1.H6 ; IC1.F4 223.49,333.37 223.49,335.22 v1(222.34,336.37) 235.97,350 IC1.E4 ; v1(254,209) 269.01,224.01 IC1.J5 ; v1(254.19,271.37) IC1.G5 ; v1(254.22,365.66) 254.22,365.86 IC1.D5 279.34,372 291.86,372 IC1.D6 ; IC1.F5 255,333.35 v1(255,334) 255,335.15 IC1.E5 v1(285.6,350) IC1.E6 IC1.D6 ; IC1.B5 284.16,458.79 v1(284.16,460.11) ; v1(285,209) 300.01,224.01 IC1.J6 ; v1(285.48,271.34) 301.14,287 IC1.G6 ; v1(285.48,302.84) 285.69,302.84 IC1.F6 ; IC1.K6 301.35,177.37 305.53,173.19 v1(305.53,172.03) ; v1(316.03,208.66) 317.5,208.66 IC1.J7 ; v1(316.98,271.34) 317.19,271.34 IC1.G7 ; v1(316.98,302.84) 317.19,302.84 IC1.F7 ; v1(317,334) 332.85,349.85 IC1.E7 ; IC1.K7 348,207.67 v1(348,208) 348.86,208 IC1.K8 379.82,208 v1(380,208) 380.36,208 IC1.K9 v1@380.21,176.89 ; IC1.H7 348.48,271.14 v1(348.48,271.34) ; v1(348.48,302.84) 364.14,318.5 IC1.F8 ; v1(348.63,333.34) 364.34,349.04 IC1.E8 IC1.E9 ; IC1.C8 IC1.D8 364.34,381.29 v1(348.71,365.66) IC1.D7 331.49,381.49 320,370 312.84,370 IC1.D6 ; v1(379.97,302.84) 395.63,318.5 IC1.F9 ; v1(443,301) 444.15,302.15 444.15,303.82 IC1.F11
  Top w6: v2(107.57,344.2) 110.81,344.2 116.62,350 IC1.E1 ; C3.2 C4.2 168.97,533.5 171.97,530.5 172.49,530.5 176,526.99 176,476.61 IC1.A2 159,459.61 159,429.36 IC1.C2 ; C1.1 371.13,102 C18.2 398,105 398,158.86 IC1.L9 ; IC1.D9 IC1.C10 ; v1(525.76,469.21) 525.86,469.1 540.9,469.1 C41.2
  Bottom w4: C16.1 116.84,281 C13.1 ; C35.1 C37.1 ; J1.19 J1.19@315.16,439.37 ; v1(391.41,149.51) 391.41,151.13 394.62,154.34 394.62,157.62 C44.1 ; C45.1 444.97,195.23 443.45,196.75 443.45,200.06 447.39,204 C27.1
  Bottom w6: IC3.2 66.83,100 v2(67.04,99.79) ; v1(44.78,148.03) 45.55,148.8 45.55,156.07 54,164.53 R4.2 ; C31.1 60.89,22.5 72.51,34.12 82.15,34.12 v2(84.06,36.03) 86.35,33.74 94.63,33.74 105.87,22.5 C30.1 ; J1.19@315.16,439.37 327.11,451.32 ; C23.2 393.83,355 C38.2 C29.2 ; J1.5 452.95,455.95 462,465 ; C20.1 497.91,282.61 C26.1 540.52,276.88 555.34,276.9 C48.1 ; R2.2 472.29,52.59 487.01,52.59 496.12,61.69 496.12,62.17 497.5,63.56 IC2.2@497.99,63.56 ; C32.2 C40.2 503.87,355 C34.1 ; C36.1@582.78,173.94 608.07,199.23 624.57,199.23 C14.1
  other v1: 186,28 243,28 304,31 18,163 380.18,176.89 254.1,192.52 18,210 316.48,239.85 348.48,239.85 606.95,334.74 408,385.1 35,391 66,405.43 608,459 34,483 502,492 182.2,493.09 318,493 381,493 444,493 291.45,523.47 156,524 210.36,523.57 527.2,524.46 606,556 34,579 69,617 137,618 426,622 499,622 570,623 246,626 309,629
  other v2: 542.4,70.21 206.72,119.95 554.35,197.51 103.62,247.76 577.28,401.76 469,526 350.86,534.63
RESET_N: IC1.C5 IC2.5 R3.1 | length 738.9
  Top w4: IC1.C5 285.86,429 308,429 317,438 v1(317,459)
  3-SIG w4: v1(317,459) 305.75,447.75 305.75,188.25 317,177 317,149.34 321,145.34 v1(321,144)
  4-SIG w4: v1(321,144) 340,125 590.48,125 v1(630.82,84.66)
SPI_MISO: IC1.K11 J1.15 | length 325.4
  3-SIG w4: v1(377.46,362.65) 377.46,339.54 397,320 397,264 404,257 404,243 397,236 397,194 407.36,183.64 v1(467.46,183.63)
  Bottom w4: J1.15 357.57,418.21 357.57,398.43 370,386 370,385.86 377.46,378.4 v1(377.46,362.65)
SPI_MOSI: J1.17
SPI_SCLK: J1.13
SPI_SSEL: J1.11
SW: IC2.3 L4.2 | length 62.4
  Bottom w8: L4.2 454.75,107.4 IC2.3
VAA: C6.2 C19.1 C29.1 C34.2 C36.2 C38.1 C40.1 IC1.C1 IC1.D10 IC1.E10 IC1.E11 IC1.F10 L6.1 | length 816.5
  Top w4: IC1.E10 431.04,350 435.65,354.6 435.74,354.6 v5(444.79,363.65) ; IC1.D10 427.33,381.11 v5(444.79,363.65) ; L6.1 503.63,305 444.98,363.65 v5(444.79,363.65)
  Top w6: L6.1 543.87,285.13 550,279 578.18,279 v2(603.81,253.37)
  4-SIG w4: v1(134.56,421.55) 307.45,421.55 333,396 333,382 338.08,376.92 386.08,376.92 399.35,363.65 v5(444.79,363.65)
  Bottom w4: C19.1 119.04,376 115.12,379.92 115.12,380.88 114,382 114,410 125.55,421.55 v1(134.56,421.55) ; C6.2 C6.2@426.16,315.19 ; C38.1@435,354.03 C38.1 435.97,335.97 426.16,326.16 C6.2@426.16,315.19 ; v1(440.18,318.73) 439.03,317.59 428.55,317.59 C6.2@426.16,315.19 ; v5(444.79,363.65) 447.49,363.65 451.27,359.88 455.04,359.88 458.97,355.96 C40.1 458.97,354.04 462.89,350.12 463.85,350.12 486.09,327.87 C34.2@514.97,327.87
VAA_PIX: C32.1 C46.2 C48.2 IC1.D11 L7.1 | length 112.6
  Top w4: IC1.D11 470.32,370 504,370 518,384 C46.2
  Bottom w4: v1(448.2,387.98) 449.35,386.83 449.35,384.62 454.09,379.88 455.04,379.88 458.97,375.96 C32.1
  other v4: 538,366
VCC: C14.2 IC2.4 J1.2 J1.10 J1.20 J1.30 J1.36 | length 1222.6
  3-SIG w8: v2(504.12,590.21) 505.91,592 615,592 621,586 621,132.02 615.96,126.98 v2(615.96,124.27)
  Bottom w4: v2(615.96,124.27) 615.96,153.25 624.97,162.26 C14.2
  Bottom w6: J1.36 157.68,609.68 168,620 209,620 216.73,612.27 J1.30 217.62,577.85 217.62,551.38 220.02,548.98 222,547 310,547 314.33,551.33 314.33,577.91 J1.20 315.16,609.16 326,620 402,620 413.58,608.42 J1.10 415.54,576.78 415.54,552.46 424,544 487,544 492.32,549.32 J1.2
  Bottom w10: J1.20@314.97,571.03 J1.20@315.13,570.87
VDD: C1.2 C2.2 C4.1 C5.1 C11.1 C18.1 C27.2 C28.2 C35.2 C39.2 C41.1 C43.2 C44.2 IC1.A3 IC1.A4 IC1.B1 IC1.B11 IC1.F1 IC1.J11 IC1.K1 IC1.L2 IC1.L5 IC1.L8 IC1.L10 L1.1 | length 1831.4
  Top w4: C11.1 66.96,437 71.5,441.54 71.5,442.14 73.84,444.48 126.82,444.48 v1(132.44,438.87) 133.59,440.01 135.69,440.01 140.15,444.48 IC1.B1 ; v1(187.97,545.67) 188.98,545.67 193.31,550 225,550 229.37,545.63 229.37,536.6 C5.1
  Top w6: L1.1 175.37,95.24 IC1.L2 ; C4.1 190.97,521.76 206.86,505.87 IC1.A3 ; C5.1 230.97,485.35 238.36,477.96 IC1.A4 ; IC1.L5 269.85,98.58 C2.2 295.43,97 C1.2 364.34,129.46 IC1.L8 ; C18.1 414,105 414,110.01 413.99,147.69 IC1.L10 ; IC1.B11 481.52,444.48 487.02,438.98 489.28,436.72 506.72,436.72 517,447 C41.1
  3-SIG w5: v1(142.97,331.31) 141.54,329.88 v1@140.11,328.45 ; v1(151,182) 120.19,212.81 120.19,308.54 v1@140.11,328.45 ; v1(187.97,545.67) 188.92,546.63 188.92,549.92 210,571 210,612 202,620 172,620 165,613 165,594 143,572 143,449.43 v1(132.44,438.87) 131.08,438.87 128.58,436.37 128.37,436.37 123,431 123,418 141,400 141,388 140.11,387.11 140.11,331.31 v1@140.11,328.45
  3-SIG w6: v1(465.29,234.77) 476,245.48 476,344 509,377 509,442 v2(516,449)
  4-SIG w6: v1(151,182) 151.77,181.23 157.13,181.23 v1(167.45,170.91) 179.41,158.95 202.05,158.95 203.1,160 251.94,160 v1(258.14,166.2) ; v1(351.7,161.85) 412.21,161.85 v1(422.57,172.21) 465.29,214.93 v1(465.29,234.77)
  Bottom w6: v1@166.69,171.68 v1(167.45,170.91)
VDD_IO_PHY: C23.1 C25.2 C26.2 IC1.C9 L5.1 | length 463
  Top w4: v1(380,390) 380.2,390.2 380.2,397.35 IC1.C9
  3-SIG w6: v2(524.99,237.47) 507,255.46 507,361.01 524.99,379 524.99,429.33 v2(525.85,430.19)
  4-SIG w6: v1(380,390) 417.9,427.9 523.55,427.9 v2(525.85,430.19)
  Bottom w4: v1(380,390) 387.97,382.04 387.97,379.95 391.92,376 C23.1@394.01,376
  Bottom w6: L5.1 484.9,167.06 C26.2@484.9,199.03
VDD_PHY: C8.2 C9.2 C22.1 IC1.C7 L2.1 | length 345.2
  Top w4: IC1.C7 349,396.84 349,388.26 v1(348.82,388.08)
  Top w6: L2.1 326.87,570 C8.2 386.38,575.13 C9.2
  3-SIG w6: v1(348.82,388.08) 364,403.26 364,515.07 v2(378.64,529.71)
  Bottom w4: C22.1 337.01,381 342.94,386.93 347.67,386.93 v1(348.82,388.08)
VDD_REG: C12.1 C15.2 L1.2 L2.2 L3.2 L4.1 R1.2 | length 1085.9
  Top w6: v2(115,589) 213.84,589 L2.2
  3-SIG w6: v2(96,377) 55,336 55,162.65 v2(145.92,71.73)
  4-SIG w6: v2(96,377) 96,570 v2(115,589)
  Bottom w6: v2(145.92,71.73) 173.65,44 282.11,44 C15.2@316.39,78.29 ; C15.2@322.41,68.08 339.49,51 R1.2 367.3,22.57 C12.1 ; C15.2@325.8,77.84 366.21,77.84 385.65,97.28 L4.1 L4.1@367.3,86.65
VDD_SLVS: C16.2 C17.2 C21.1 IC1.C6 L3.1 | length 449.6
  Top w4: IC1.C6 317,397.34 v1(317,389.64)
  4-SIG w4: v1(58.05,377.34) 74.39,361 108,361 150,403 220,403 239.35,383.65 259.65,383.65 280,404 302.64,404 v1(317,389.64)
  Bottom w4: C21.1 300.93,381 304.85,384.92 304.85,385.88 308.61,389.64 v1(317,389.64)
  Bottom w6: L3.1 54.62,358.22 C17.2@54.62,327.7 ; C17.2 63.63,317.13 C16.2
VDDA: C31.2 IC3.1 J1.4 Q1.2 | length 1544
  3-SIG w8: v2@33.24,39.3 33.24,18.69 37.93,14 533,14 534,15 600,15 618,33 618,93 633,108 633,374 634,375 634,591 615.59,609.41 v2(472.49,609.41)
  Bottom w4: IC3.1 31.19,75 68,75 81.43,88.43 81.43,139.43 94.04,152.04 Q1.2@94.04,167.26
  Bottom w6: C31.2 25.34,69.53 30.22,74.41 IC3.1
  other v2: 33.62,39.68
VDDIO: C3.1 C7.1 C10.1 C13.2 C20.2 C24.1 C33.2 C37.2 C42.2 C45.2 C47.2 C49.2 IC1.A1 IC1.A5 IC1.A11 IC1.D1 IC1.H1 IC1.H11 IC1.L1 IC1.L4 IC1.L7 IC1.L11 L8.1 | length 1731.8
  Top w4: IC1.A5@269.85,474.15 IC1.A5
  Top w6: C3.1 129.74,534.26 129.74,523.26 143.87,509.13 IC1.A1 ; IC1.A5 270.97,477.1 270.97,506.05 ; C7.1@270.97,535 270.97,506.05 ; v1(283.79,506) 283.74,506.05 270.97,506.05 ; v1(452.33,150.41) 462.13,140.62 L8.1 491,72 C49.2 ; IC1.H11 553.62,255.51 C47.2@554,255.13 ; IC1.A11 504.97,522.12 C10.1@504.97,534
  3-SIG w6: v1(154.43,483.24) 154.64,483.03 v1(154.64,374.61) 153.97,373.94 153.97,249.3 148.92,244.25 148.92,232.73 187.65,194 209.13,194 v1(231.23,171.91) ; v1(447.83,262.4) 447.83,246.14 444.62,242.93 444.62,235.09 428.53,219 420,219 414,213 414,200 421,193 450,193 454,197 476,197 482,191 482,180.07 v1(452.33,150.41)
  4-SIG w4: v1(154.43,483.24) 177.19,506 v1(283.79,506) 456.86,506 462.13,500.72 v1(462.13,488.14)
  4-SIG w6: v1(141.05,173.41) 140.29,174.18 140.29,177 140,177.29 140,190 144,194 209.13,194 v1(231.23,171.91) 237.32,178 260,178 266,184 316.02,184 v1(327.24,172.78) 328.01,172.02 328.01,165.99 358,136 404,136 418.41,150.41 v1(452.33,150.41)
  Bottom w4: v1(141.05,173.41) 142.2,172.26 142.2,163.77 C33.2
  other v1: 153.97,249.77
VDDIO_REG: C30.2 IC2.1 IC3.5 L5.2 L6.2 L7.2 L8.2 | length 1079.7
  Top w6: v2(123.02,60.09) 136.11,47 363,47 388,72 L8.2 427.87,53.13 449.11,31.89 v2(540.99,31.89) ; L7.2 590.96,334.17 590.96,327.04 v6(592,326) 590.96,324.96 590.96,317.83 L6.2
  3-SIG w6: v2(540.99,31.89) 579,69.89 579,313 v6(592,326)
  Bottom w6: IC3.5 118.14,74.41 123.02,69.53 v2(123.02,60.09) 123.66,60.09 142.09,41.65 C30.2 ; L5.2 519.68,152.41 519.68,148.32 572.25,95.75 572.25,44.17 559.96,31.89 v2(540.99,31.89)
pads on no net: FD1.1 FD2.1 FD3.1 FD4.1 FD5.1 FD6.1 FD7.1 FD8.1 H1.P$1 H1.P$2 IC1.A6 IC1.A7 IC1.A8 IC1.A9 IC1.A10 IC1.B6 IC1.B7 IC1.B8 IC1.B9 IC1.B10 IC1.C11 IC1.G8 IC1.G9 IC1.G10 IC1.G11 IC1.H10 IC1.J8 IC1.J9 IC1.J10 IC3.4 J1.0 J1.MH1 J1.MH2
copper on no net:
  other v2: 68,477 582,477 69,520 581,520
  other v3: -275.03,325 924.97,325

## Polygon pours and split planes (outlines as drawn)
GND on Bottom "GND_L06_P002" (solid, remove dead copper, pour order 2): -366,650 -366,0 1025,0 1025,650
GND on 5-GND "GND_L05_P003" (solid, remove dead copper, pour order 3): -366,650 -366,0 1025,0 1025,650
GND on 2-GND "GND_L02_P004" (solid, remove dead copper, pour order 4): -366,650 -366,0 1025,0 1025,650

## Keep-outs
Keep-Out Layer:
  the board outline again, w5

## Other copper
Bottom:
  region: 594.47,534.82 537.66,534.82 537.66,463.77 594.47,463.77
  rectangle: 55.53,463.77 112.34,534.82

## Silkscreen, mask and mechanical layers (free items; w line width, h text height)
Bottom Overlay:
  text "AR0231 R1" at 593.34,385 h30 r270
  text "openmv.io" at 10.01,377 h30 r270
Dimension:
  lines w3.94: 1091.57,-15.67 1190.42,-15.67 1381.28,-15.67 1522.26,-15.67 ; 1091.57,31.74 1190.42,31.74 1381.28,31.74 1522.26,31.74 ; 1091.57,79.15 1190.42,79.15 1381.28,79.15 1522.26,79.15 ; 1091.57,126.55 1190.42,126.55 1381.28,126.55 1522.26,126.55 ; 1091.57,173.96 1190.42,173.96 1381.28,173.96 1522.26,173.96 ; 1091.57,221.37 1190.42,221.37 1381.28,221.37 1522.26,221.37 ; 1091.57,268.78 1190.42,268.78 1381.28,268.78 1522.26,268.78 ; 1091.57,316.18 1190.42,316.18 1381.28,316.18 1522.26,316.18 ; 1091.57,363.59 1190.42,363.59 1381.28,363.59 1522.26,363.59 ; 1091.57,411 1190.42,411 1381.28,411 1522.26,411 ; 1091.57,458.41 1190.42,458.41 1381.28,458.41 1522.26,458.41 ; 1091.57,505.82 1190.42,505.82 1381.28,505.82 1522.26,505.82 ; 1091.57,553.22 1190.42,553.22 1381.28,553.22 1522.26,553.22 ; 1091.57,600.63 1190.42,600.63 1381.28,600.63 1522.26,600.63 ; 1091.57,648.04 1522.26,648.04 ; 1190.42,695.45 1190.42,-63.08 ; 1381.28,695.45 1381.28,-63.08 ; 1190.42,-63.08 1091.57,-63.08 1091.57,695.45 1522.26,695.45 1522.26,-63.08 1381.28,-63.08 ; 1190.42,-63.08 1381.28,-63.08
  text "OpenMV FHD-HDR-AR0231" at 61.58,732.2 h80
  text "Layer" at 1115.27,659.89 h23.7
  text "Name" at 1214.12,659.89 h23.7
  text "Thickness" at 1404.99,659.89 h23.7
  text "Top Overlay" at 1214.12,612.48 h23.7
  text "Top Solder" at 1214.12,565.08 h23.7
  text "0.010mm" at 1404.99,565.08 h23.7
  text "1" at 1115.27,517.67 h23.7
  text "Top" at 1214.12,517.67 h23.7
  text "0.035mm" at 1404.99,517.67 h23.7
  text "Dielectric 2" at 1214.12,470.26 h23.7
  text "0.127mm" at 1404.99,470.26 h23.7
  text "2" at 1115.25,422.85 h23.7
  text "2-GND" at 1214.1,422.85 h23.7
  text "0.035mm" at 1404.99,422.85 h23.7
  text "Dielectric 3" at 1214.12,375.44 h23.7
  text "0.254mm" at 1404.99,375.44 h23.7
  text "3" at 1115.27,328.04 h23.7
  text "3-SIG" at 1214.12,328.04 h23.7
  text "0.035mm" at 1404.99,328.04 h23.7
  text "Dielectric 1" at 1214.12,280.63 h23.7
  text "0.200mm" at 1404.99,280.63 h23.7
  text "4" at 1115.27,233.22 h23.7
  text "4-SIG" at 1214.12,233.22 h23.7
  text "0.035mm" at 1404.99,233.22 h23.7
  text "Dielectric 4" at 1214.12,185.81 h23.7
  text "0.254mm" at 1404.99,185.81 h23.7
  text "5" at 1115.27,138.41 h23.7
  text "5-GND" at 1214.12,138.41 h23.7
  text "0.035mm" at 1404.99,138.41 h23.7
  text "Dielectric 9" at 1214.12,91 h23.7
  text "0.127mm" at 1404.99,91 h23.7
  text "6" at 1115.27,43.59 h23.7
  text "Bottom" at 1214.12,43.59 h23.7
  text "0.035mm" at 1404.99,43.59 h23.7
  text "TG-170 or equivalent substrate  / Er = 4.3-4.5 @ 1MHz / +/- 10% /  / double side solder mask red / double side silkscreen white /  / 3 mil min trace width and / 3 mil min isolation /  / RoHS required" at 1666,13.11 h30
  text "Bottom Solder" at 1214.12,-3.82 h23.7
  text "0.010mm" at 1404.99,-3.82 h23.7
  text "Bottom Overlay" at 1214.12,-51.23 h23.7
tPlace:
  circle w10: c-275.03,325 r90.14
  circle w10: c924.97,325 r90.14
bPlace:
  text "AR0231 R1" at 610.28,415.44 h27.2 r270
  text "openmv.io" at 34.34,410.91 h27.2 r270